# Altium PCB AC to DC Power Supply.PcbDoc
Units mm, origin at the board's own origin, x right, y up, seen from the top; angles counter-clockwise.
Board outline 111.89 x 34.04 mm, 2 copper layers (Top Layer, Bottom Layer); 9 components, 8 nets, 23 pads, 4 vias.
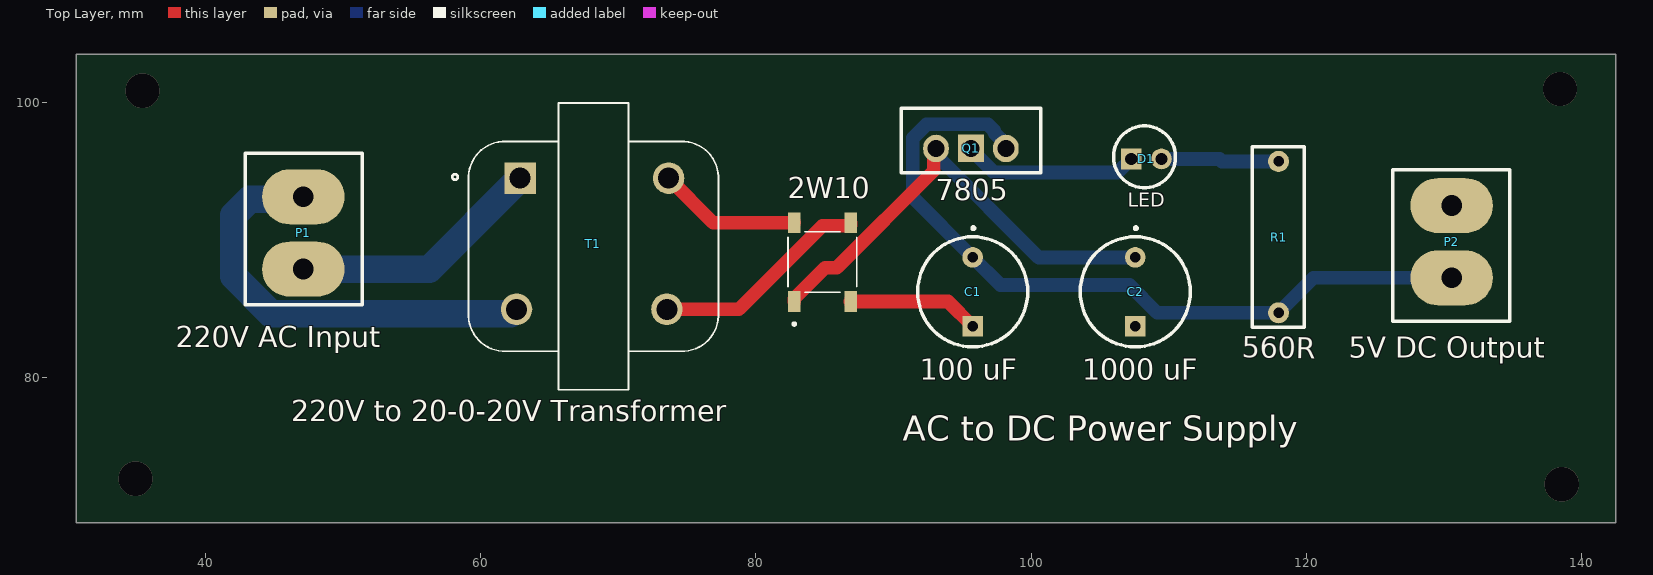
[diagram p0: Top Layer view]
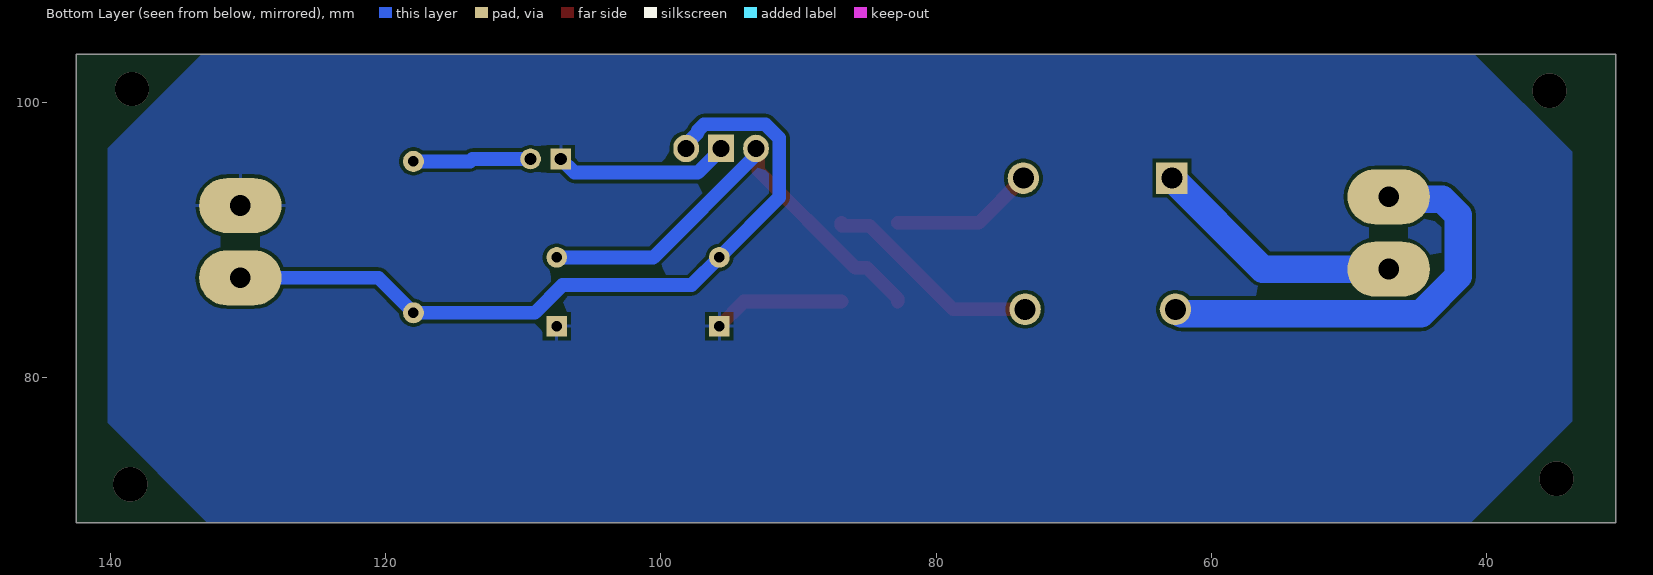
[diagram p1: Bottom Layer view, seen from below]
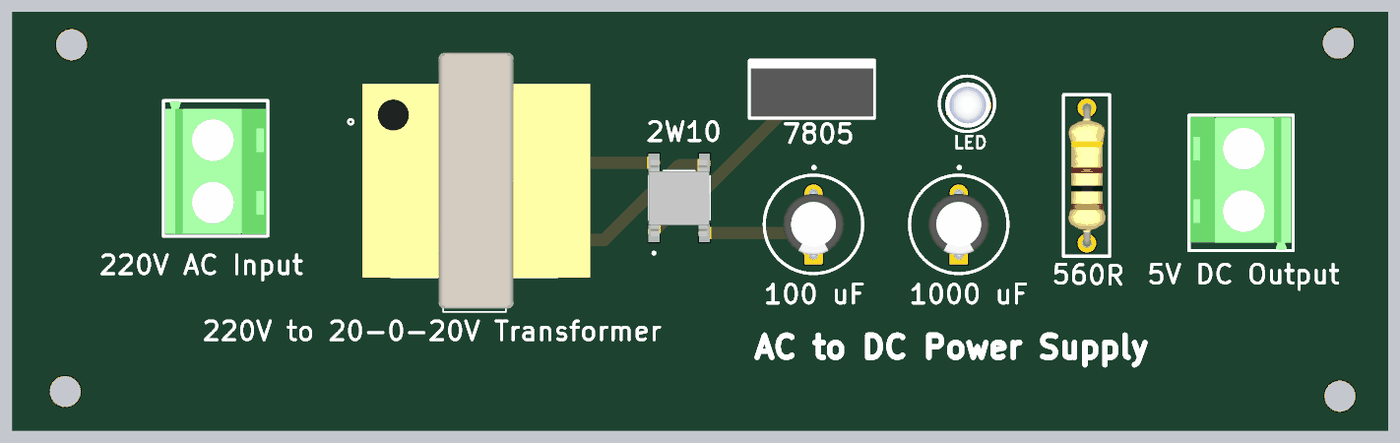
[diagram p2: 3D render of the assembled board from above, using the file's embedded part models]

## Layer stack, top to bottom
Top Solder: solder mask 0.0102, Solder Resist, Dk 3.5
Top Layer: signal copper 0.0356
Dielectric 1: dielectric 0.32, FR-4, Dk 4.8
Bottom Layer: signal copper 0.0356
Bottom Solder: solder mask 0.0102, Solder Resist, Dk 3.5

## Board outline
30.607,69.469 142.494,69.469 142.494,103.505 30.607,103.505

## Design rules (kind name [scope] priority, off if disabled: settings)
Clearance [All] p1: gap=0.254 ignorepadtopadclearanceinfootprint=FALSE
PolygonConnect [All] p1: connectstyle=Relief reliefconductorwidth=0.254 reliefentries=4 polygonreliefangle="90 Angle" airgapwidth=0.254
RoutingVias [All] p1: holewidth=0.711 width=1.27 viastyle="Through Hole" minholewidth=0.711 minwidth=1.27 maxholewidth=0.711 maxwidth=1.27
SolderMaskExpansion [All] p1: expansion=0.102 istentingtop=FALSE
SupplyNets "Schematic Supply Nets" [InNet('GND')] p1: voltage=0.000
Width [All] p1: maxlimit=2.5 minlimit=0.8 preferedwidth=1
30 further rules are at their usual default settings.

## Components (designator, comment, footprint, x,y, rotation, side; value= is the part's Value field where it differs from the comment)
2W10 "" *DIOB_ABS8_REG 84.836,88.392 r90 top
C1 "100 uF" "Capacitor (Polar)" 95.758,86.233 r270 top
C2 "1000 uF" "Capacitor (Polar)" 107.569,86.233 r270 top
D1 "self" "LED (RED)" 109.474,95.885 r0 top
P1 "220V AC Input" "Terminal Block 2 Pin" 47.117,87.884 r270 top
P2 "5V DC Output" "Terminal Block 2 Pin" 130.556,92.499 r90 top
Q1 "LM7805CT/NOPB" "LM7805CT/NOPB - duplicate" 93.091,96.647 r0 top
R1 "560R" Resistor 117.983,84.709 r90 top
T1 "220V to 20-0-20V Transformer" XFMR_TY-400P 68.199,89.535 r0 top (schematic designator T?)

## Footprints (in the part's own frame and the unit in brackets; to place one, negate y for a bottom-side part, rotate by r counter-clockwise, add the part's x,y. Pads: shape width x height; smd on the part's side, far side on the other; paste and mask are expansions set on the pad)
*DIOB_ABS8_REG [mm]
  rect 1.5x0.9 smd: 1(2.86,-2.05) 2(-2.86,2.05) 3(2.86,2.05) 4(-2.86,-2.05)
  silkscreen extent -4.6,-2.5 2.2,2.5, body extent -3.13,-2.46 3.07,2.49, height 1.5
"Capacitor (Polar)" [mm]
  rect 1.5x1.5 hole 0.75: N(2.5,0)
  round 1.5 hole 0.75: P(-2.5,0)
  silkscreen extent -4.72,-4 4,4, body extent -2.75,-2.5 2.75,2.5, height 14
"LED (RED)" [mm]
  round 1.5 hole 0.9: 1(0,0)
  rect 1.5x1.5 hole 0.9: 2(-2.2,0)
  silkscreen extent -3.48,-2.09 1.02,2.4, body extent -3.02,-1.79 0.68,1.91, height 5.5
"LM7805CT/NOPB - duplicate" [mm]
  oval 1.86x2 hole 1.24: 1(0,0) 3(5.08,0)
  rect 1.86x2 hole 1.24: 2(2.54,0)
  silkscreen extent -2.54,-1.78 7.62,2.92, body extent -2.44,-1.62 7.53,2.83, height 19.75
Resistor [mil]
  round 60 hole 30: 1(0,0) 2(433.07,0)
  silkscreen extent -42,-73 475,75, body extent -11,-60 446,59, height 138
"Terminal Block 2 Pin" [mm]
  oval 4x6 hole 1.5: 1(0,0) 2(-5.25,0)
  silkscreen extent -8.41,-4.21 2.61,4.27, body extent -8.33,-4.04 2.43,4.16, height 10
XFMR_TY-400P [mil]
  rect 90x90 / inner round 90 / far side rect 90x90 hole 60: 1(-210,195)
  round 90 hole 60: 2(-220,-180) 3(210,-180) 4(215,195)
  silkscreen extent -404,-410 358,410, body extent -360,-400 370,420, height 768

## Part data
2W10: library part Component_1
C1 C2: library part "Capacitor (Polar)", "CAP ALUM 1UF 20% 50V RADIAL", Package="RADIAL-2 Panasonic", Availability="Not in stock", Check_prices=https://www.snapeda.com/parts/EEU-EB1H1R0SB/Panasonic/view-part/6222296/?ref=eda, MF="Panasonic Electronic Components", MP=EEU-EB1H1R0SB, Price=None, SnapEDA_Link=https://www.snapeda.com/parts/EEU-EB1H1R0SB/Panasonic/view-part/6222296/?ref=snap
D1: library part "LED (Red)", "Red"
P1 P2: library part "Terminal Block 2 Pin", "2 pin", Package=None, Availability="In Stock", Check_prices=https://www.snapeda.com/parts/282837-2/TE+Connectivity+AMP+Connectors/view-part/?ref=eda, MF="TE Connectivity", MP=282837-2, Price=None, Purchase-URL=https://pricing.snapeda.com/search/part/282837-2/?ref=eda, SnapEDA_Link=https://www.snapeda.com/parts/282837-2/TE+Connectivity+AMP+Connectors/view-part/?ref=snap
Q1: "1.5-A, 30-V, linear voltage regulator", Package="TO-220 Comset Semiconductors", Availability="Not in stock", Check_prices=https://www.snapeda.com/parts/LM7805CT/Comset+Semiconductors/view-part/?ref=eda, MF="Comset Semiconductors", MP=LM7805CT, Price=None, SnapEDA_Link=https://www.snapeda.com/parts/LM7805CT/Comset+Semiconductors/view-part/?ref=snap
R1: library part Resistor
T1: library part TY-400P, "Transformer, audio, FCC68, 600:600, 90mADC", Package=None, Check_prices=https://www.snapeda.com/parts/TY-400P/Triad+Magnetics/view-part/?ref=eda, MF="Triad Magnetics", MP=TY-400P, SnapEDA_Link=https://www.snapeda.com/parts/TY-400P/Triad+Magnetics/view-part/?ref=snap

## Via types
v1: diameter 2.5, hole 2.5, Top Layer to Bottom Layer, 4 vias

## Nets (pads, with @x,y where several pads share a name; then routed paths per layer and width w, separated by ;. In a path a pad name is that pad's centre, name@x,y a point inside that pad or via, vN(x,y) a via of type N, cw(c..) or ccw(c..) an arc to the next point about the centre after c; other vN are vias at no path point)
GND: 2W10.4 C1.N C2.N D1.2 P2.1 Q1.2 | length 22.4
  Top Layer w1: 2W10.4 93.959,85.532 C1.N
  Bottom Layer w1: Q1.2 95.631,96.577 97.315,94.893 106.282,94.893 D1.2
Net_1: 2W10.1 T1.3 | length 16.1
  Top Layer w1: T1.3 78.763,84.963 84.836,91.036 86.836,91.036 86.886,91.086 2W10.1
Net_2: 2W10.2 C2.P Q1.1 | length 33.9
  Top Layer w1: 2W10.2 82.786,85.732 85.04,87.986 85.886,87.986 92.926,95.026 92.926,96.482 Q1.1
  Bottom Layer w1: Q1.1 93.256,96.482 93.256,96.026 100.549,88.733 C2.P
Net_3: 2W10.3 T1.4 | length 10.5
  Top Layer w1: T1.4 76.896,91.252 2W10.3
NetC1_P: C1.P P2.2 Q1.3 R1.1 | length 56.2
  Bottom Layer w1: Q1.3 98.171,96.95 97.315,97.806 97.315,97.959 96.873,98.401 92.393,98.401 91.407,97.415 91.407,93.084 C1.P 97.768,86.723 107.145,86.723 109.159,84.709 R1.1 120.523,87.249 P2.2
NetD1_1: D1.1 R1.2 | length 8.6
  Bottom Layer w1: D1.1 113.685,95.885 113.861,95.709 R1.2
NetP1_1: P1.1 T1.1 | length 18.5
  Bottom Layer w2: P1.1 56.261,87.884 T1.1
NetP1_2: P1.2 T1.2 | length 31.9
  Bottom Layer w2: P1.2 46.942,92.959 43.221,92.959 42.05,91.787 42.05,87.35 44.769,84.63 62.201,84.63 62.534,84.963 T1.2
copper on no net:
  other v1: 138.557,72.263 34.925,72.644 35.433,100.838 138.43,100.965

## Polygon pours and split planes (outlines as drawn)
GND on Bottom Layer "GND_L02_P000" (solid, pour order 0): 133.35,103.505 140.208,96.647 140.208,76.708 132.969,69.469 41.148,69.469 33.782,76.835 33.782,96.393 40.894,103.505

## Silkscreen, mask and mechanical layers (free items; w line width, h text height)
Top Overlay:
  text "AC to DC Power Supply" at 90.67,75.395 h1.8

## Text inside footprints (layer, text, board x,y; h text height)
D1: Top Overlay "LED" at 107.015,92.413 h1
Q1: Top Overlay "7805" at 93.08,92.881 h1.52